# Altium PCB Lab5.PcbDoc
Units mm, origin at the board's own origin, x right, y up, seen from the top; angles counter-clockwise.
Board outline 89.28 x 70.23 mm, 2 copper layers (Top Layer, Bottom Layer), stack 1.671 mm thick; 35 components, 26 nets, 94 pads, 40 vias.
Unrouted connection lines stored in the file: 1.
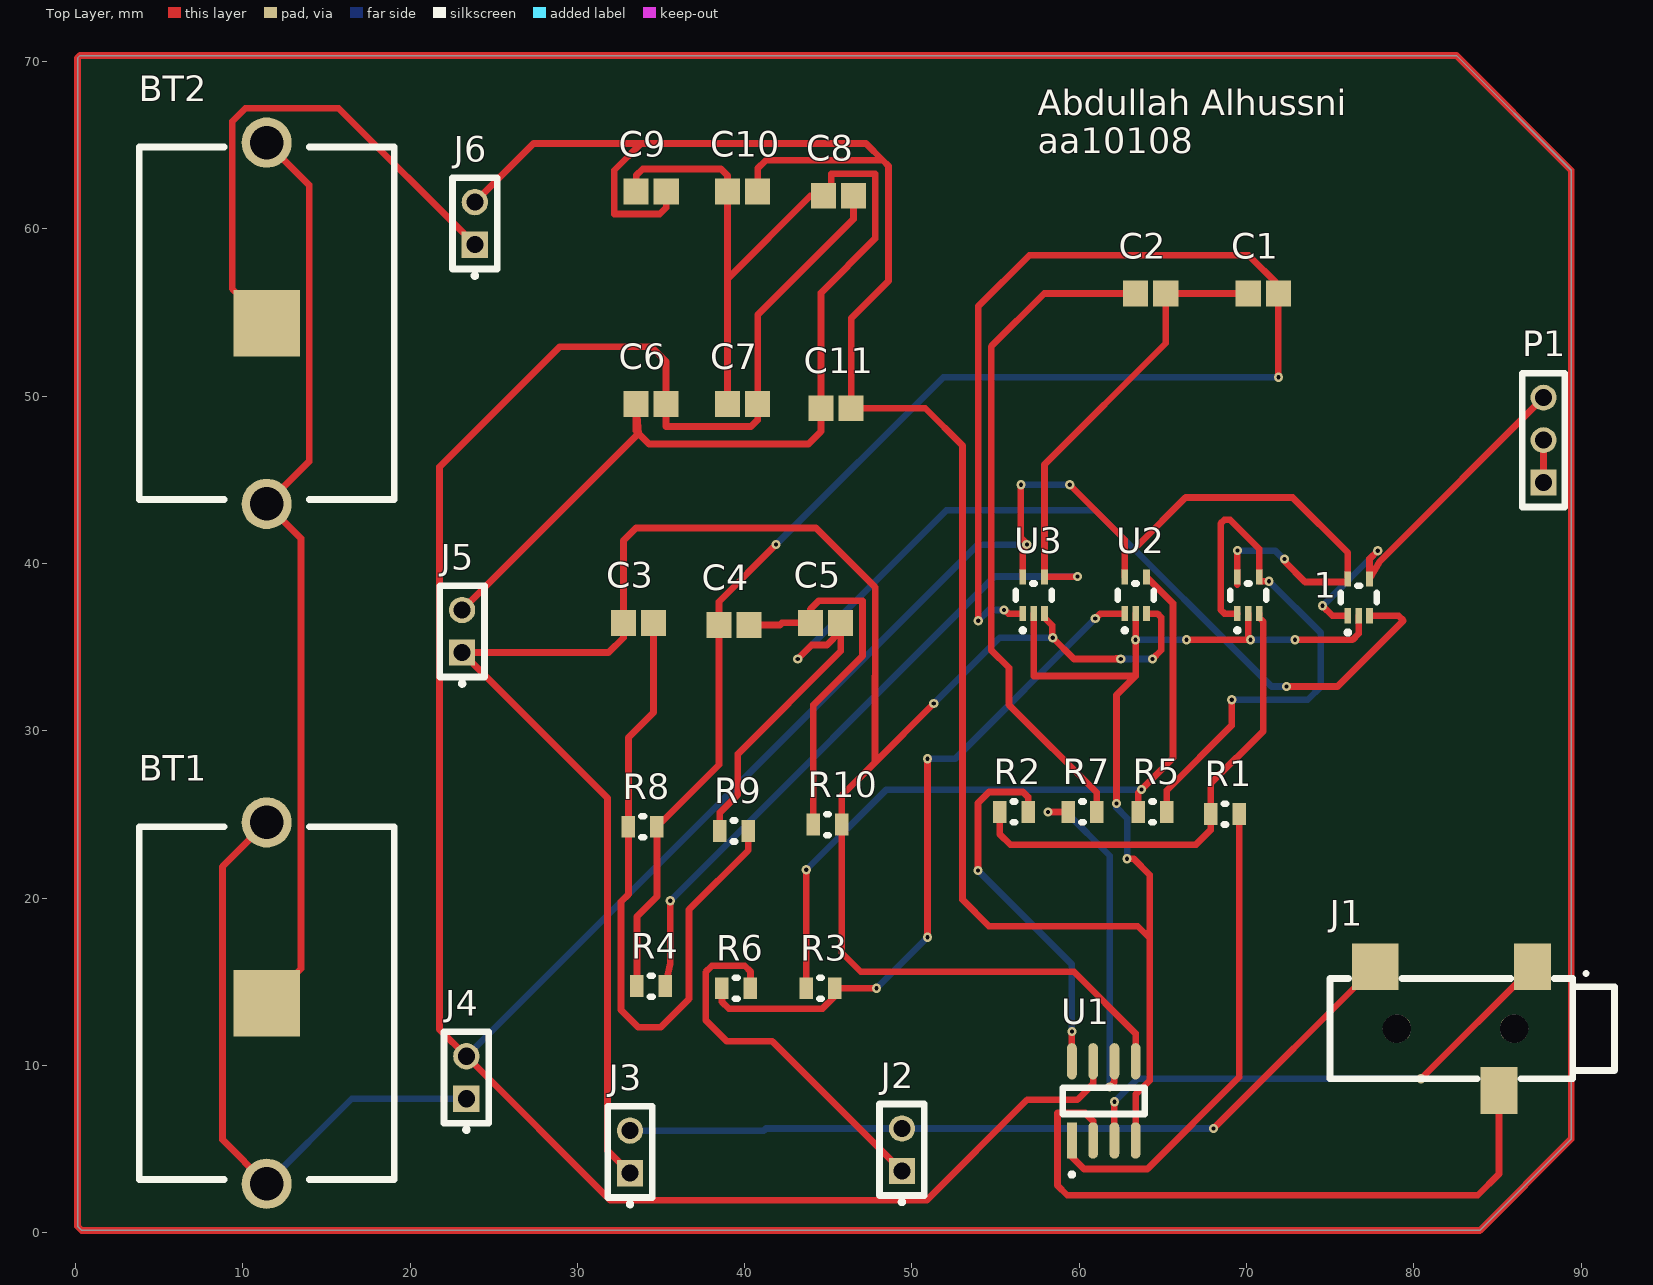
[diagram p0: Top Layer view]
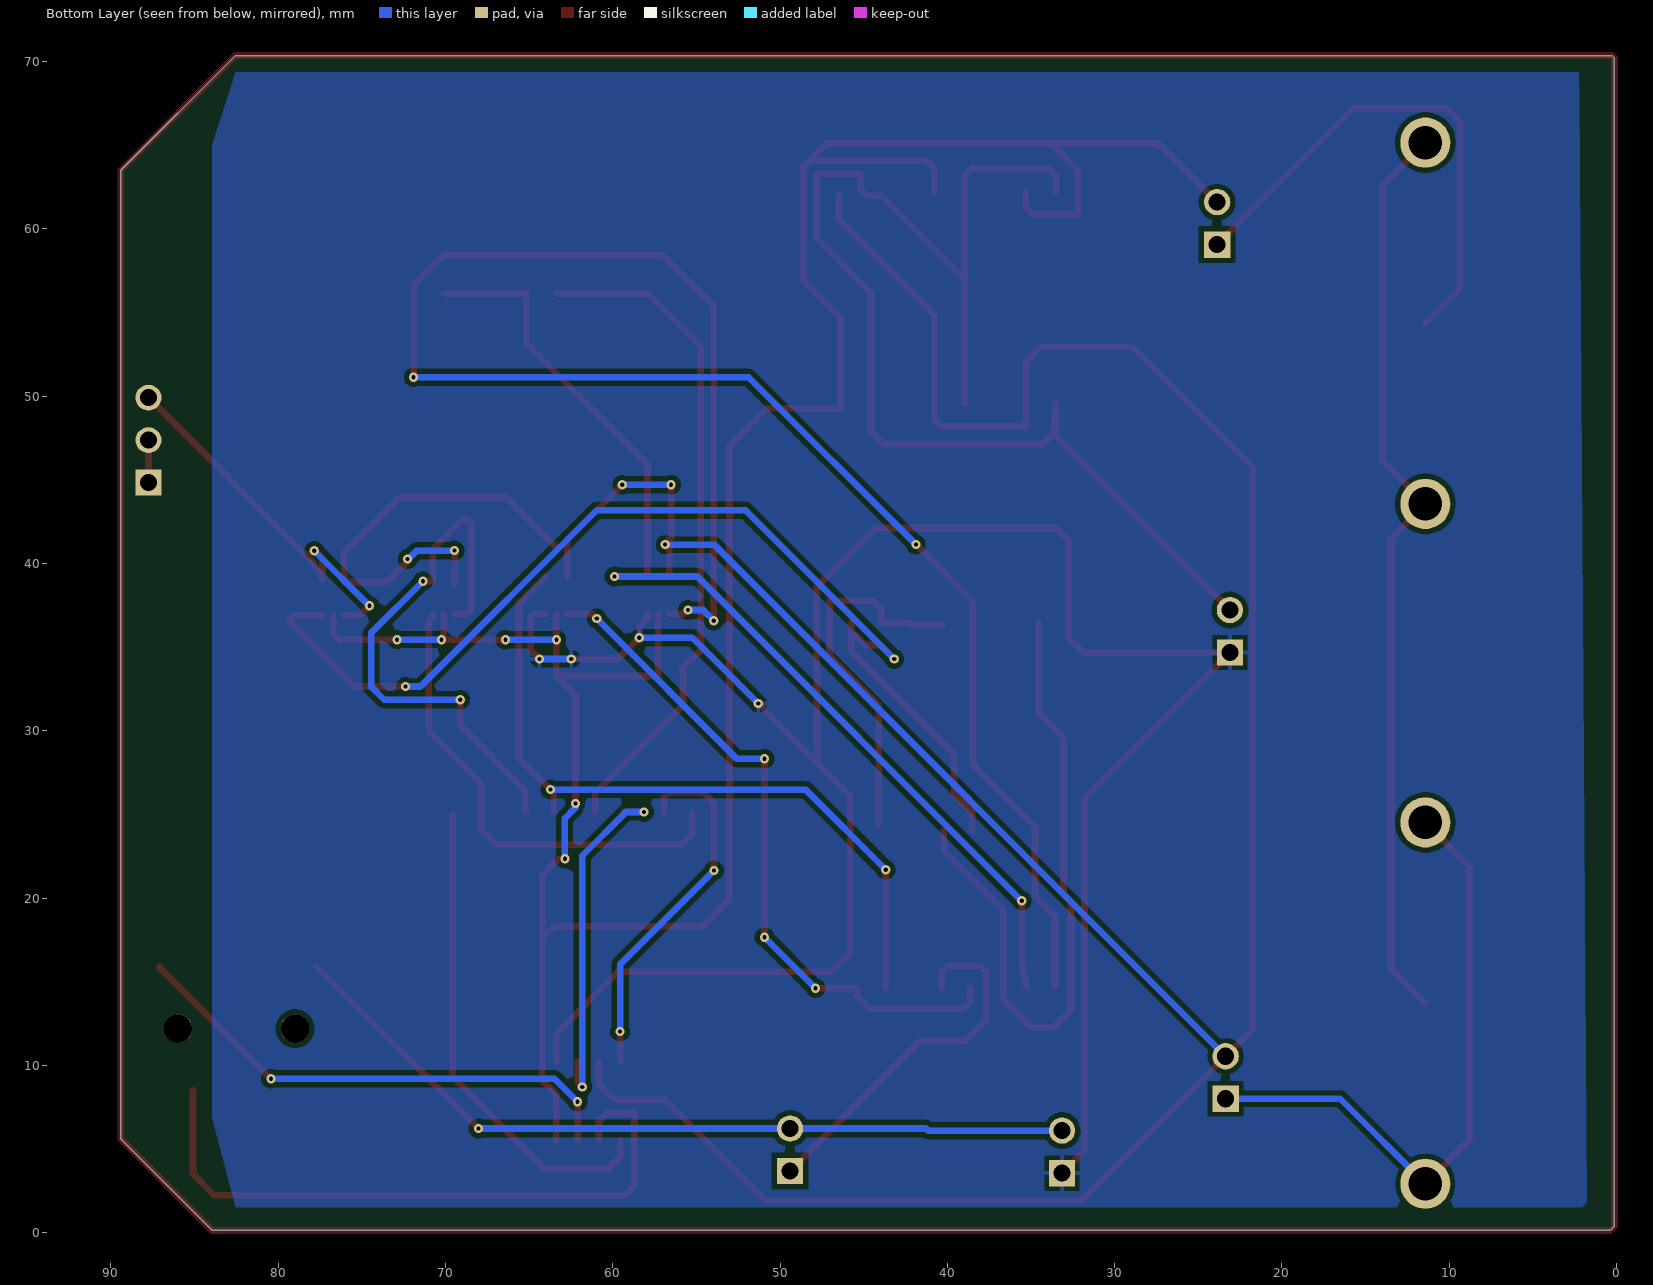
[diagram p1: Bottom Layer view, seen from below]
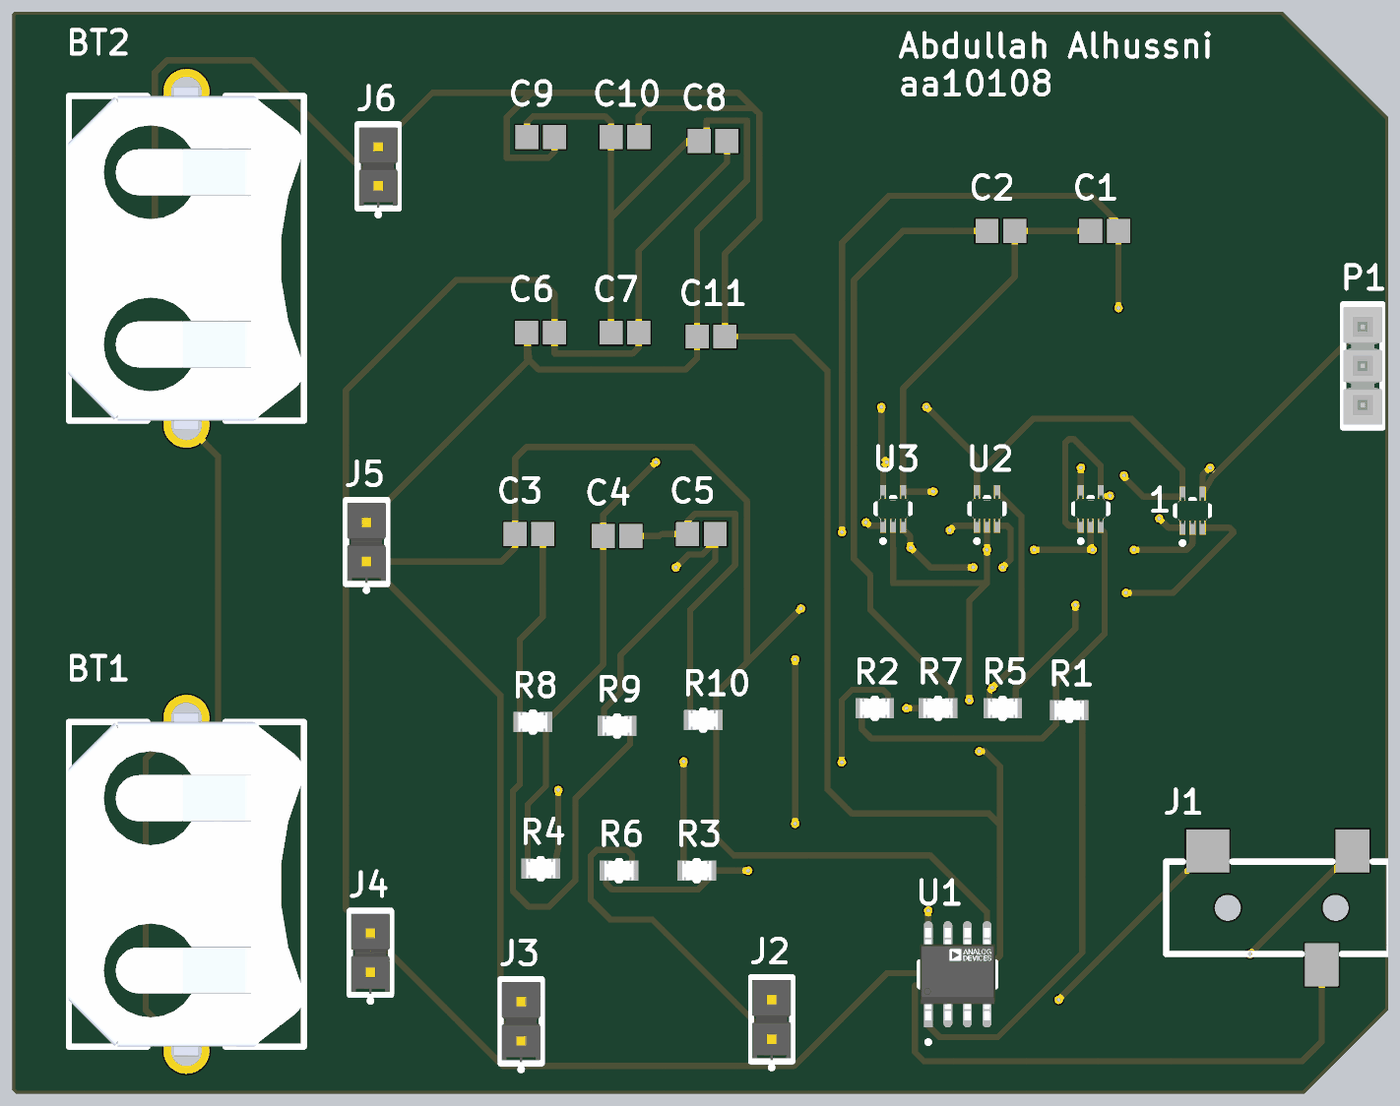
[diagram p2: 3D render of the assembled board from above, using the file's embedded part models]

## Layer stack, top to bottom
Top Solder: solder mask 0.0102, Solder Resist, Dk 3.5
Top Layer: signal copper 0.0356
Dielectric 1: dielectric 1.6, FR-4, Dk 4.8
Bottom Layer: signal copper 0.0356
Bottom Solder: solder mask 0.0102, Solder Resist, Dk 3.5

## Board outline
0.127,0.381 0.127,70.209 0.276,70.358 82.55,70.358 89.408,63.5 89.408,5.588 83.947,0.127 0.381,0.127

## Design rules (kind name [scope] priority, off if disabled: settings)
Clearance [All] p1: gap=0.3 ignorepadtopadclearanceinfootprint=TRUE except(0.1: Arc-SMDPad Track-SMDPad SMDPad-SMDPad)
HoleToHoleClearance [All] p1: gap=0.45 allowstackedmicrovias=TRUE
PolygonConnect [All] p1: connectstyle=Relief reliefconductorwidth=0.254 reliefentries=4 polygonreliefangle="90 Angle" airgapwidth=0.254
RoutingVias [All] p1: holewidth=0.25 width=0.55 viastyle="Through Hole" minholewidth=0.2 minwidth=0.5 maxholewidth=0.3 maxwidth=0.6
SilkToSolderMaskClearance [IsPad] p1: minsilkscreentomaskgap=0.1 clearancetoexposedcopper=FALSE
SolderMaskExpansion [All] p1: expansion=0.102 istentingtop=FALSE
SupplyNets "Schematic Supply Nets" [InNet('GND')] p1: voltage=0.000
Width [All] p1: maxlimit=1 minlimit=0.4 preferedwidth=0.4
28 further rules are at their usual default settings.

## Classes and differential pairs
component class Lab5: 1 BT1 BT2 C1 C2 C3 C4 C5 C6 C7 C8 C9 C10 C11 J1 J2 J3 J4 J5 J6 P1 R1 R2 R3 R4 R5 R7 R8 R9 R10

## Components (designator, comment, footprint, x,y, rotation, side; value= is the part's Value field where it differs from the comment)
1 "TLV521DCKT" FP-DCK0005A-MFG 76.708,37.973 r90 top
BT1 "BK-913-TR" BAT_BK-913-TR 11.43,13.716 r90 top
BT2 "BK-913-TR" BAT_BK-913-TR 11.43,54.356 r90 top
C1 "C0805C225K9PACTU" CAPC2013X145X50ML20T25 71.004,56.134 r0 top
C2 "C0805C225K9PACTU" CAPC2013X145X50ML20T25 64.273,56.134 r0 top
C3 "C0805C225K9PACTU" CAPC2013X145X50ML20T25 33.655,36.449 r0 top
C4 "C0805C225K9PACTU" CAPC2013X145X50ML20T25 39.37,36.322 r0 top
C5 "C0805C225K9PACTU" CAPC2013X145X50ML20T25 44.842,36.449 r0 top
C6 "C0805C225K9PACTU" CAPC2013X145X50ML20T25 34.406,49.53 r0 top
C7 "C0805C225K9PACTU" CAPC2013X145X50ML20T25 39.878,49.53 r0 top
C8 "C0805C225K9PACTU" CAPC2013X145X50ML20T25 45.604,61.976 r0 top
C9 "C0805C225K9PACTU" CAPC2013X145X50ML20T25 34.417,62.23 r180 top
C10 "C0805C225K9PACTU" CAPC2013X145X50ML20T25 39.878,62.23 r180 top
C11 "C0805C225K9PACTU" CAPC2013X145X50ML20T25 45.466,49.276 r180 top
J1 "SJ-3523-SMT-TR" CUI_SJ-3523-SMT-TR 85.994,12.192 r180 top
J2 "TSW-102-07-L-S" FP-TSW-102-07-L-S-MFG 49.403,4.953 r90 top
J3 "TSW-102-07-L-S" FP-TSW-102-07-L-S-MFG 33.147,4.826 r90 top
J4 "TSW-102-07-L-S" FP-TSW-102-07-L-S-MFG 23.368,9.271 r90 top
J5 "TSW-102-07-L-S" FP-TSW-102-07-L-S-MFG 23.114,35.941 r90 top
J6 "TSW-102-07-L-S" FP-TSW-102-07-L-S-MFG 23.876,60.325 r90 top
P1 "TSW-103-07-F-S" SMTC-TSW-103-07-X-S 87.757,44.831 r90 top
R1 "CRCW080516K0FKEA" FP-CRCW0805-e3-IPC_C 68.707,25.019 r0 top
R2 "CRCW080516K0FKEA" FP-CRCW0805-e3-IPC_C 56.096,25.146 r0 top
R3 "CRCW080516K0FKEA" FP-CRCW0805-e3-IPC_C 44.539,14.605 r0 top
R4 "CRCW080516K0FKEA" FP-CRCW0805-e3-IPC_C 34.417,14.732 r180 top
R5 "CRCW080516K0FKEA" FP-CRCW0805-e3-IPC_C 64.389,25.146 r180 top
R6 "CRCW080516K0FKEA" FP-CRCW0805-e3-IPC_C 39.497,14.605 r0 top
R7 "CRCW080516K0FKEA" FP-CRCW0805-e3-IPC_C 60.198,25.146 r0 top
R8 "CRCW080516K0FKEA" FP-CRCW0805-e3-IPC_C 33.909,24.257 r180 top
R9 "CRCW080516K0FKEA" FP-CRCW0805-e3-IPC_C 39.37,24.003 r180 top
R10 "CRCW080516K0FKEA" FP-CRCW0805-e3-IPC_C 44.958,24.384 r180 top
U1 "AD620ARZ-REEL7" FP-R-8-IPC_B 61.468,7.874 r90 top
U2 "TLV521DCKT" FP-DCK0005A-MFG 63.373,38.1 r90 top
U3 "TLV521DCKT" FP-DCK0005A-MFG 57.277,38.1 r90 top
? "TLV521DCKT" FP-DCK0005A-MFG 70.104,38.1 r90 top

## Footprints (in the part's own frame and the unit in brackets; to place one, negate y for a bottom-side part, rotate by r counter-clockwise, add the part's x,y. Pads: shape width x height; smd on the part's side, far side on the other; paste and mask are expansions set on the pad)
BAT_BK-913-TR [mm]
  round 3 hole 2: 1(-10.8,0) 2(10.8,0)
  rect 3.96x3.96 smd: 3(0,0)
  silkscreen extent -10.54,-7.62 10.54,7.62, body extent -11.15,-7.62 11.15,7.67, height 4.27
CAPC2013X145X50ML20T25 [mm] "Chip Capacitor, 2-Leads, Body 2.00x1.25mm, IPC Low Density"
  rect 1.5x1.55 smd: 1(-0.9,0) 2(0.9,0)
  body extent -1.1,-0.72 1.1,0.72, height 1.45
CUI_SJ-3523-SMT-TR [mm]
  rect 2.2x2.8 smd: 1(-1.1,-3.7) 3(0.9,3.7)
  rect 2.8x2.8 smd: 2(8.3,-3.7)
  round 1.7 hole 1.7 unplated: ""(0,0) ""(7,0)
  silkscreen extent -6,-3.4 11,3
FP-CRCW0805-e3-IPC_C [mil]
  rect 31.75x51.5 smd paste+0 mask+0: 1(-33.5,0) 2(33.5,0)
  silkscreen extent -3,-25 3,25, body extent -53,-31 53,31, height 10
FP-DCK0005A-MFG [mm]
  rect 0.9x0.4 smd paste-1000 mask+0: 1(-1.1,0.65) 2(-1.1,0) 3(-1.1,-0.65) 4(1.1,-0.65) 5(1.1,0.65)
  silkscreen extent -2.22,-1.07 0.7,1.07, body extent -1.65,-1.33 1.65,1.33, height 0.25
FP-R-8-IPC_B [mm]
  rect 2.174x0.582 smd paste+0 mask+0: 1(-2.366,1.905)
  rrect100% 2.174x0.582 smd paste+0 mask+0: 2(-2.366,0.635) 3(-2.366,-0.635) 4(-2.366,-1.905) 5(2.366,-1.905) 6(2.366,-0.635) 7(2.366,0.635) 8(2.366,1.905)
  silkscreen extent -4.53,-2.45 0.78,2.45, body extent -3.7,-2.7 3.7,2.7, height 0.25
FP-TSW-102-07-L-S-MFG [mm]
  rect 1.57x1.57 hole 1.02 paste-2539.97 mask+0: 1(-1.27,0)
  round 1.57 hole 1.02 paste-2539.97 mask+0: 2(1.27,0)
  silkscreen extent -3.25,-1.34 2.73,1.34, body extent -2.83,-1.44 2.83,1.44, height 0.25
SMTC-TSW-103-07-X-S [mm] ".025 SQ Post Terminal Strip Assembly, 1x3 Pins, Vertical, 2.54mm Pitch, Male"
  rect 1.55x1.55 hole 1.02: 1(0,0)
  round 1.55 hole 1.02: 2(2.54,0) 3(5.08,0)
  silkscreen extent -1.46,-1.27 6.54,1.27, body extent -1.27,-1.27 6.35,1.27, height 8.38

## Part data
1 U2 U3 ?: library part CMP-04895-000072-1, "IC CMOS 1 CIRCUIT SC70-5", Case/Package=SC, Input Bias Current=1pA, Input Offset Voltage (Vos)=100uV, Max Operating Temperature=125°C, Min Operating Temperature=-40°C, Operating Supply Current=350nA, Output Current per Channel=12mA, Bandwidth=6kHz, Gain Bandwidth Product=6kHz, Lead Free="Lead Free", Mount="Surface Mount", Number of Amplifiers=1, Number of Channels=1, Number of Circuits=1, Number of Pins=5, Packaging="Cut Tape", REACH SVHC="No SVHC", Slew Rate=2.5V/µs
BT1 BT2: "Battery Retainer Coin, 20.0mm 1 Cell PC Pin", Package=None, Check_prices=https://www.snapeda.com/parts/BK-913-TR/Memory+Protection+Devices/view-part/?ref=eda, MF="MPD (Memory Protection Devices)", MP=BK-913-TR, SnapEDA_Link=https://www.snapeda.com/parts/BK-913-TR/Memory+Protection+Devices/view-part/?ref=snap
C1 C2 C3 C4 C5 C6 C7 C8 C9 C10 C11: library part CMP-1036-04819-2, Manufacturer=Kemet, Part Number=C0805C225K9PACTU
J1: "<b>Audio Jack Connector</b> 3.5 mm Low Profile Surface Mount Stereo Jack, 3 Pin Right-Angle", Package=None, Availability=Unavailable, MP=SJ-3523-SMT-TR, Price=None
J2 J3 J4 J5 J6: library part CMP-02766-001428-1, "CONN HEADER VERT 2POS 2.54MM", Color=Black, Current Rating=7.6A, Max Operating Temperature=125°C, Max Voltage Rating (AC)=550V, Min Operating Temperature=-55°C, Package Quantity=1, Connector Type="Male Pin", Contact Material=Bronze, Contact Mating Length=0.23inch, Contact Plating=Gold, Contact Type="Male Pin", Depth=2.54mm, Gender=Male, Housing Color=Black, Housing Material=Polyester, Lead Free="Lead Free", Length=5.08mm, Max Current Rating=7.6A, Mount="Through Hole", Number of Contacts=2, Number of Positions=2, Number of Rows=1, Orientation=Straight, Packaging=Bulk, Pitch=2.54mm, Radiation Hardening=No, REACH SVHC="No SVHC", RoHS Compliant=Yes, Series=TSW, Termination=Solder, Voltage Rating=550V, Width=2.54mm
P1: library part CMP-1024-00331-1, "0.025\" SQ Post Header, Through-hole, Vertical, -55 to 125 degC, 2.54 mm Pitch, 3-Pin, Male, RoHS", Manufacturer=Samtec, Temperature Range="-55 to 125 degC", ComponentLink1Description="Manufacturer URL", ComponentLink1URL=http://www.samtec.com, ComponentLink2Description=Datasheet, ComponentLink2URL=http://www.samtec.com/documents/webfiles/pdf/TSW_TH.PDF, ComponentLink3Description="Package Specification", ComponentLink3URL=http://www.samtec.com/documents/webfiles/cpdf/TSW-XXX-XX-XXX-X-XX-XXX-MKT.pdf, DatasheetVersion=F-214, Mounting Technology=Through-hole, Orientation=Vertical, PackageDescription=".025[0.64] SQ. Post Terminal Strip Assembly", PackageReference=TSW-103-07-X-S, PackageVersion="DM, 8/1988", PartNumber=TSW-103-07-F-S, Pitch="2.54 mm", RoHS=True
R1 R2 R3 R4 R5 R6 R7 R8 R9 R10: library part CMP-2001-04979-2, "RES Thick Film, 16kΩ, 1%, 0.125W, 100ppm/°C, 0805", Case Code (Imperial)=0805, Case Code (Metric)=2012, Max Operating Temperature=155°C, Max Power Dissipation=125mW, Min Operating Temperature=-55°C, Package Quantity=10, Resistance=16kR, Temperature Coefficient=100ppm/°C, Tolerance=1%, Voltage Rating=150V, Case/Package=0805, Composition="Thick Film", Contact Plating=Tin, Depth=1.25mm, Features="Automotive AEC-Q200", Height=0.45mm, Lead Free="Lead Free", Length=2mm, Military Standard=Not, Mount="Surface Mount", Number of Pins=2, Number of Terminations=2, Packaging="Tape and Reel", Power Rating=125mW, Radiation Hardening=No, Termination=SMD/SMT, Voltage Rating (DC)=150V, Weight=0.000194oz, Width=1.25mm
U1: library part CMP-09116-000354-1, "IC INST AMP 1 CIRCUIT 8SOIC", Case/Package=SOIC, Dual Supply Voltage=15V, Input Bias Current=500pA, Input Offset Voltage (Vos)=30mV, Input Resistance=10GR, Max Dual Supply Voltage=18V, Max Operating Temperature=125°C, Max Power Dissipation=650mW, Min Dual Supply Voltage=2.3V, Min Operating Temperature=-55°C, Min Supply Voltage=4.6V, Nominal Supply Current=900uA, Operating Supply Current=1.3mA, Output Current per Channel=18mA, Package Quantity=1, Power Supply Rejection Ratio (PSRR)=140dB, -3db Bandwidth=1MHz, Bandwidth=800kHz, Common Mode Rejection Ratio=93dB, Contact Plating=Tin, Lead Free="Contains Lead", Mount="Surface Mount", Number of Channels=1, Number of Circuits=1, Number of Elements=1, Number of Pins=8, Operating Supply Voltage=18V, Packaging="Tape and Reel", Power Dissipation=650mW, Radiation Hardening=No, RoHS Compliant=Yes, Series=-, Slew Rate=1.2V/µs, Supply Current=900uA

## Via types
v1: diameter 0.55, hole 0.25, Top Layer to Bottom Layer, 40 vias

## Nets (pads, with @x,y where several pads share a name; then routed paths per layer and width w, separated by ;. In a path a pad name is that pad's centre, name@x,y a point inside that pad or via, vN(x,y) a via of type N, cw(c..) or ccw(c..) an arc to the next point about the centre after c; other vN are vias at no path point)
DRL: J2.1 R6.2 | length 22.3
  Top Layer w0.4: R6.2 40.348,15.608 40.005,15.951 38.049,15.951 37.668,15.57 37.668,12.7 38.938,11.43 41.656,11.43 J2.1
GND: C3.1 J3.1 J5.1 R10.1 U1.5 U2.3 U3.3 | length 137.6
  Top Layer w0.4: J3.1 31.801,4.902 31.801,25.984 J5.1 31.866,34.671 32.755,35.56 C3.1 32.755,41.366 33.503,42.113 44.272,42.113 47.803,38.583 47.796,28.111 ; v1(51.308,31.623) 47.796,28.111 ; U3.3 57.927,36.75 58.391,36.286 58.391,35.589 v1(58.42,35.56) 59.69,34.29 v1(62.484,34.29) 62.455,34.319 62.201,34.319 ; U1.5 63.373,11.913 59.69,15.596 46.939,15.596 45.809,16.726 R10.1 45.809,26.124 47.796,28.111 ; U2.3 64.673,37 64.907,36.766 64.907,34.808 v1(64.389,34.29)
  Bottom Layer w0.4: v1(51.308,31.623) 55.245,35.56 v1(58.42,35.56) ; v1(62.484,34.29) v1(64.389,34.29)
LH: J1.3 U1.2 | length 40
  Top Layer w0.4: U1.2 60.833,6.667 60.355,7.145 58.699,7.145 58.699,2.819 59.287,2.231 83.82,2.231 85.094,3.505 J1.3
Net1_1: 1.1 1.4 P1.3 | length 23.4
  Top Layer w0.4: v1(74.549,37.465) 75.141,36.873 1.1 ; v1(77.844,40.76) 77.358,40.274 1.4 77.962,40.116 P1.3
  Bottom Layer w0.4: v1(74.549,37.465) v1(77.844,40.76)
Net1_3: 1.3 C5.2 R9.2 | length 66.7
  Top Layer w0.4: R9.2 38.519,25.108 39.599,26.187 39.599,28.604 45.742,34.747 C5.2@45.742,35.946 ; v1(43.18,34.29) 44.014,35.124 44.92,35.124 C5.2@45.742,35.946 ; C5.2 C5.2@45.742,35.946 ; v1(72.39,32.639) 75.434,32.639 79.375,36.58 79.082,36.873 1.3
  Bottom Layer w0.4: v1(43.18,34.29) 52.07,43.18 60.96,43.18 71.501,32.639 v1(72.39,32.639)
Net_1: ?.1 ?.4 R5.1 | length 33.4
  Top Layer w0.4: R5.1 65.24,26.441 69.113,30.315 v1(69.113,31.852) ; ?.1 68.687,37 68.453,37.234 68.453,42.38 68.687,42.614 69.019,42.614 70.754,40.879 70.754,38.938 v1(71.349,38.938)
  Bottom Layer w0.4: v1(69.113,31.852) 73.66,31.852 74.447,32.639 74.447,35.839 v1(71.349,38.938)
NetBT1_1: BT1.1 BT1.2 J4.1 | length 37.8
  Top Layer w0.4: BT1.1 8.788,5.558 8.788,21.874 BT1.2
  Bottom Layer w0.4: BT1.1 16.515,8.001 J4.1
NetBT1_3: BT1.3 BT2.1 BT2.2 | length 55.2
  Top Layer w0.4: BT1.3 13.487,15.773 13.487,41.499 BT2.1 13.97,46.096 13.97,62.616 BT2.2
NetBT2_3: BT2.3 J6.1 | length 31.1
  Top Layer w0.4: BT2.3 9.373,56.413 9.373,66.421 10.16,67.208 15.723,67.208 J6.1
NetC1_1: C1.1 C2.2 R4.1 U3.4 | length 64.3
  Top Layer w0.4: R4.1 35.56,16.091 v1(35.56,19.837) ; v1(59.893,39.218) 59.876,39.2 U3.4 57.927,45.916 65.173,53.162 C2.2 C1.1
  Bottom Layer w0.4: v1(35.56,19.837) 54.94,39.218 v1(59.893,39.218)
NetC2_1: C2.1 R7.2 | length 40.4
  Top Layer w0.4: R7.2 61.049,26.302 55.804,31.547 55.804,33.763 54.737,34.83 54.737,52.959 57.912,56.134 C2.1
NetC3_2: C3.2 R8.2 R9.1 | length 40.6
  Top Layer w0.4: C3.2 34.555,31.088 33.058,29.591 R8.2 33.058,20.218 32.614,19.774 32.614,13.31 33.655,12.268 34.976,12.268 36.678,13.97 36.678,19.304 40.221,22.847 R9.1
NetC4_2: C4.2 C5.1 R10.2 | length 22.5
  Top Layer w0.4: C4.2 42.113,36.322 42.24,36.449 C5.1 43.942,37.266 44.45,37.774 47.042,37.774 47.042,34.469 44.107,31.534 R10.2
NetC6_1: C6.1 C7.1 C8.1 C9.2 C10.2 C11.2 J5.2 | length 86.6
  Top Layer w0.4: J5.2 33.668,47.765 ; C9.2 33.517,63.182 33.911,63.576 38.584,63.576 38.978,63.182 C10.2 38.978,61.174 38.978,57.012 ; 33.668,47.765 34.29,47.142 43.815,47.142 44.566,47.893 C11.2 44.566,56.174 47.804,59.412 47.804,63.301 45.187,63.301 45.187,62.357 44.806,61.976 C8.1 43.942,61.976 38.978,57.012 ; 33.668,47.765 33.506,47.926 C6.1 33.668,47.765 ; 38.978,57.012 C7.1 38.978,57.012
NetJ1_2: J1.2 J2.2 J3.2 | length 48.6
  Top Layer w0.4: v1(68.025,6.223) J1.2
  Bottom Layer w0.4: J3.2 41.148,6.096 41.275,6.223 J2.2 v1(68.025,6.223)
NetR1_2: R1.2 U1.1 | length 29.3
  Top Layer w0.4: U1.1 59.563,4.521 60.287,3.797 64.071,3.797 69.558,9.284 R1.2
NetR2_2: R2.2 U1.8 | length 22.1
  Top Layer w0.4: v1(53.95,21.641) 53.95,25.679 54.61,26.34 56.642,26.34 56.947,26.035 R2.2 ; U1.8 v1(59.563,12.014)
  Bottom Layer w0.4: v1(53.95,21.641) 59.563,16.027 v1(59.563,12.014)
NetR3_1: R3.1 R5.2 U2.4 | length 44.7
  Top Layer w0.4: R3.1 v1(43.688,21.692) ; R5.2 63.538,26.297 v1(63.722,26.48) 65.607,28.366 65.607,37.616 U2.4
  Bottom Layer w0.4: v1(43.688,21.692) 48.476,26.48 v1(63.722,26.48)
NetR3_2: R3.2 R6.1 U2.1 | length 41.4
  Top Layer w0.4: R6.1 38.646,13.792 39.052,13.386 44.653,13.386 45.39,14.122 R3.2 v1(47.879,14.605) ; v1(50.927,17.653) v1(50.927,28.321) ; v1(60.96,36.703) 60.972,36.703 61.269,37 U2.1
  Bottom Layer w0.4: v1(47.879,14.605) v1(50.927,17.653) ; v1(50.927,28.321) 52.578,28.321 v1(60.96,36.703)
RH: J1.1 U1.3 | length 30.7
  Top Layer w0.4: U1.3 v1(62.103,7.823) ; v1(80.439,9.195) 87.094,15.85 J1.1
  Bottom Layer w0.4: v1(62.103,7.823) 63.475,9.195 v1(80.439,9.195)
Va: R7.1 U1.6 | length 21.4
  Top Layer w0.4: v1(58.141,25.146) R7.1 ; v1(61.824,8.712) 62.103,8.992 U1.6
  Bottom Layer w0.4: v1(58.141,25.146) 59.207,25.146 61.824,22.53 v1(61.824,8.712)
Vb: C1.2 C4.1 R4.2 R8.1 U3.1 | length 111.3
  Top Layer w0.4: R4.2 33.566,18.898 34.76,20.091 R8.1 38.47,27.967 C4.1 38.47,37.708 v1(41.885,41.123) ; v1(53.962,36.576) 53.962,55.359 57.023,58.42 70.121,58.42 71.904,56.637 C1.2 v1(71.904,51.13) ; v1(55.512,37.211) 55.553,37.211 55.764,37 U3.1
  Bottom Layer w0.4: v1(41.885,41.123) 51.892,51.13 v1(71.904,51.13) ; v1(53.962,36.576) 54.597,37.211 v1(55.512,37.211)
Vcm: ?.3 R1.1 R2.1 | length 28.9
  Top Layer w0.4: R2.1 55.245,23.825 55.88,23.19 66.98,23.19 67.856,24.067 R1.1 67.856,26.834 71.006,29.984 71.006,36.516 70.772,36.75 70.754,36.75 ?.3
VDD: 1.5 ?.5 C6.2 C7.2 C8.2 J4.2 U1.7 U2.5 U3.5 | length 211.4
  Top Layer w0.4: C8.2 46.504,60.579 40.778,54.853 C7.2 40.778,48.578 40.384,48.184 35.306,48.184 C6.2 35.306,52.07 34.417,52.959 28.956,52.959 21.768,45.771 21.768,12.141 J4.2 31.979,1.93 50.876,1.93 56.891,7.945 59.888,7.945 60.833,8.89 U1.7 ; v1(56.515,44.704) 56.515,41.519 56.871,41.163 v1(56.871,41.123) 56.871,41.082 56.627,40.838 U3.5 ; v1(59.436,44.704) 62.723,41.417 U2.5 ; 63.5,41.082 66.36,43.942 72.756,43.942 76.058,40.64 1.5 76.058,38.887 73.508,38.887 72.263,40.132 v1(72.263,40.259) ; 69.454,38.735 69.454,40.752 v1(69.469,40.767)
  Bottom Layer w0.4: J4.2 53.95,41.123 v1(56.871,41.123) ; v1(56.515,44.704) v1(59.436,44.704) ; v1(69.469,40.767) 71.714,40.767 72.222,40.259 v1(72.263,40.259)
Vout: P1.1 P1.2 | length 2.5
  Top Layer w0.4: P1.1 P1.2
VSS: 1.2 ?.2 C9.1 C10.1 C11.1 J6.2 U1.4 U2.2 U3.2 | length 166.5
  Top Layer w0.4: J6.2 27.381,65.1 33.807,65.1 ; C9.1 35.317,61.276 34.925,60.884 32.207,60.884 32.207,63.5 33.807,65.1 ; C10.1 40.778,63.604 41.275,64.101 48.26,64.101 ; U3.2 57.277,35.56 57.283,35.554 57.283,33.274 63.373,33.274 ; v1(62.23,25.654) 62.23,32.131 63.373,33.274 ; v1(62.865,22.352) 63.246,22.352 64.214,21.384 64.214,17.599 ; U1.4 63.373,8.255 64.214,9.096 64.214,17.599 ; U2.2 v1(63.373,35.433) 63.373,33.274 ; v1(66.421,35.433) v1(70.231,35.433) 70.231,35.474 70.104,35.601 ?.2 ; v1(72.898,35.433) 76.327,35.433 76.708,35.814 1.2 ; 33.807,65.1 47.261,65.1 48.26,64.101 ; 48.26,64.101 48.604,63.757 48.604,56.884 46.366,54.646 C11.1 50.8,49.276 53.023,47.053 53.023,19.901 54.61,18.313 63.5,18.313 64.214,17.599
  Bottom Layer w0.4: v1(62.23,25.654) 62.23,25.4 62.865,24.765 v1(62.865,22.352) ; v1(63.373,35.433) v1(66.421,35.433) ; v1(70.231,35.433) v1(72.898,35.433)
pads on no net: J1.
copper on no net: | length 311.6
  Top Layer w0.4: 0.127,0.381 0.127,70.209 0.276,70.358 82.55,70.358 89.408,63.5 89.408,5.588 83.947,0.127 0.381,0.127 0.127,0.381

## Polygon pours and split planes (outlines as drawn)
GND on Bottom Layer "GND_L02_P001" (solid, pour order 1): 2.264,69.347 82.55,69.347 83.947,65.024 83.947,6.858 82.55,1.524 1.778,1.524 2.222,68.008

## Silkscreen, mask and mechanical layers (free items; w line width, h text height)
Top Overlay:
  text "Abdullah Alhussni / aa10108" at 57.531,64.516 h1.52